# Altium PCB PCB1.pcbdoc
Units mil, origin at the board's own origin, x right, y up, seen from the top; angles counter-clockwise.
Board outline 1985.56 x 1960 mil, 2 copper layers (Top Layer, Bottom Layer); 23 components, 28 nets, 203 pads, 51 vias.
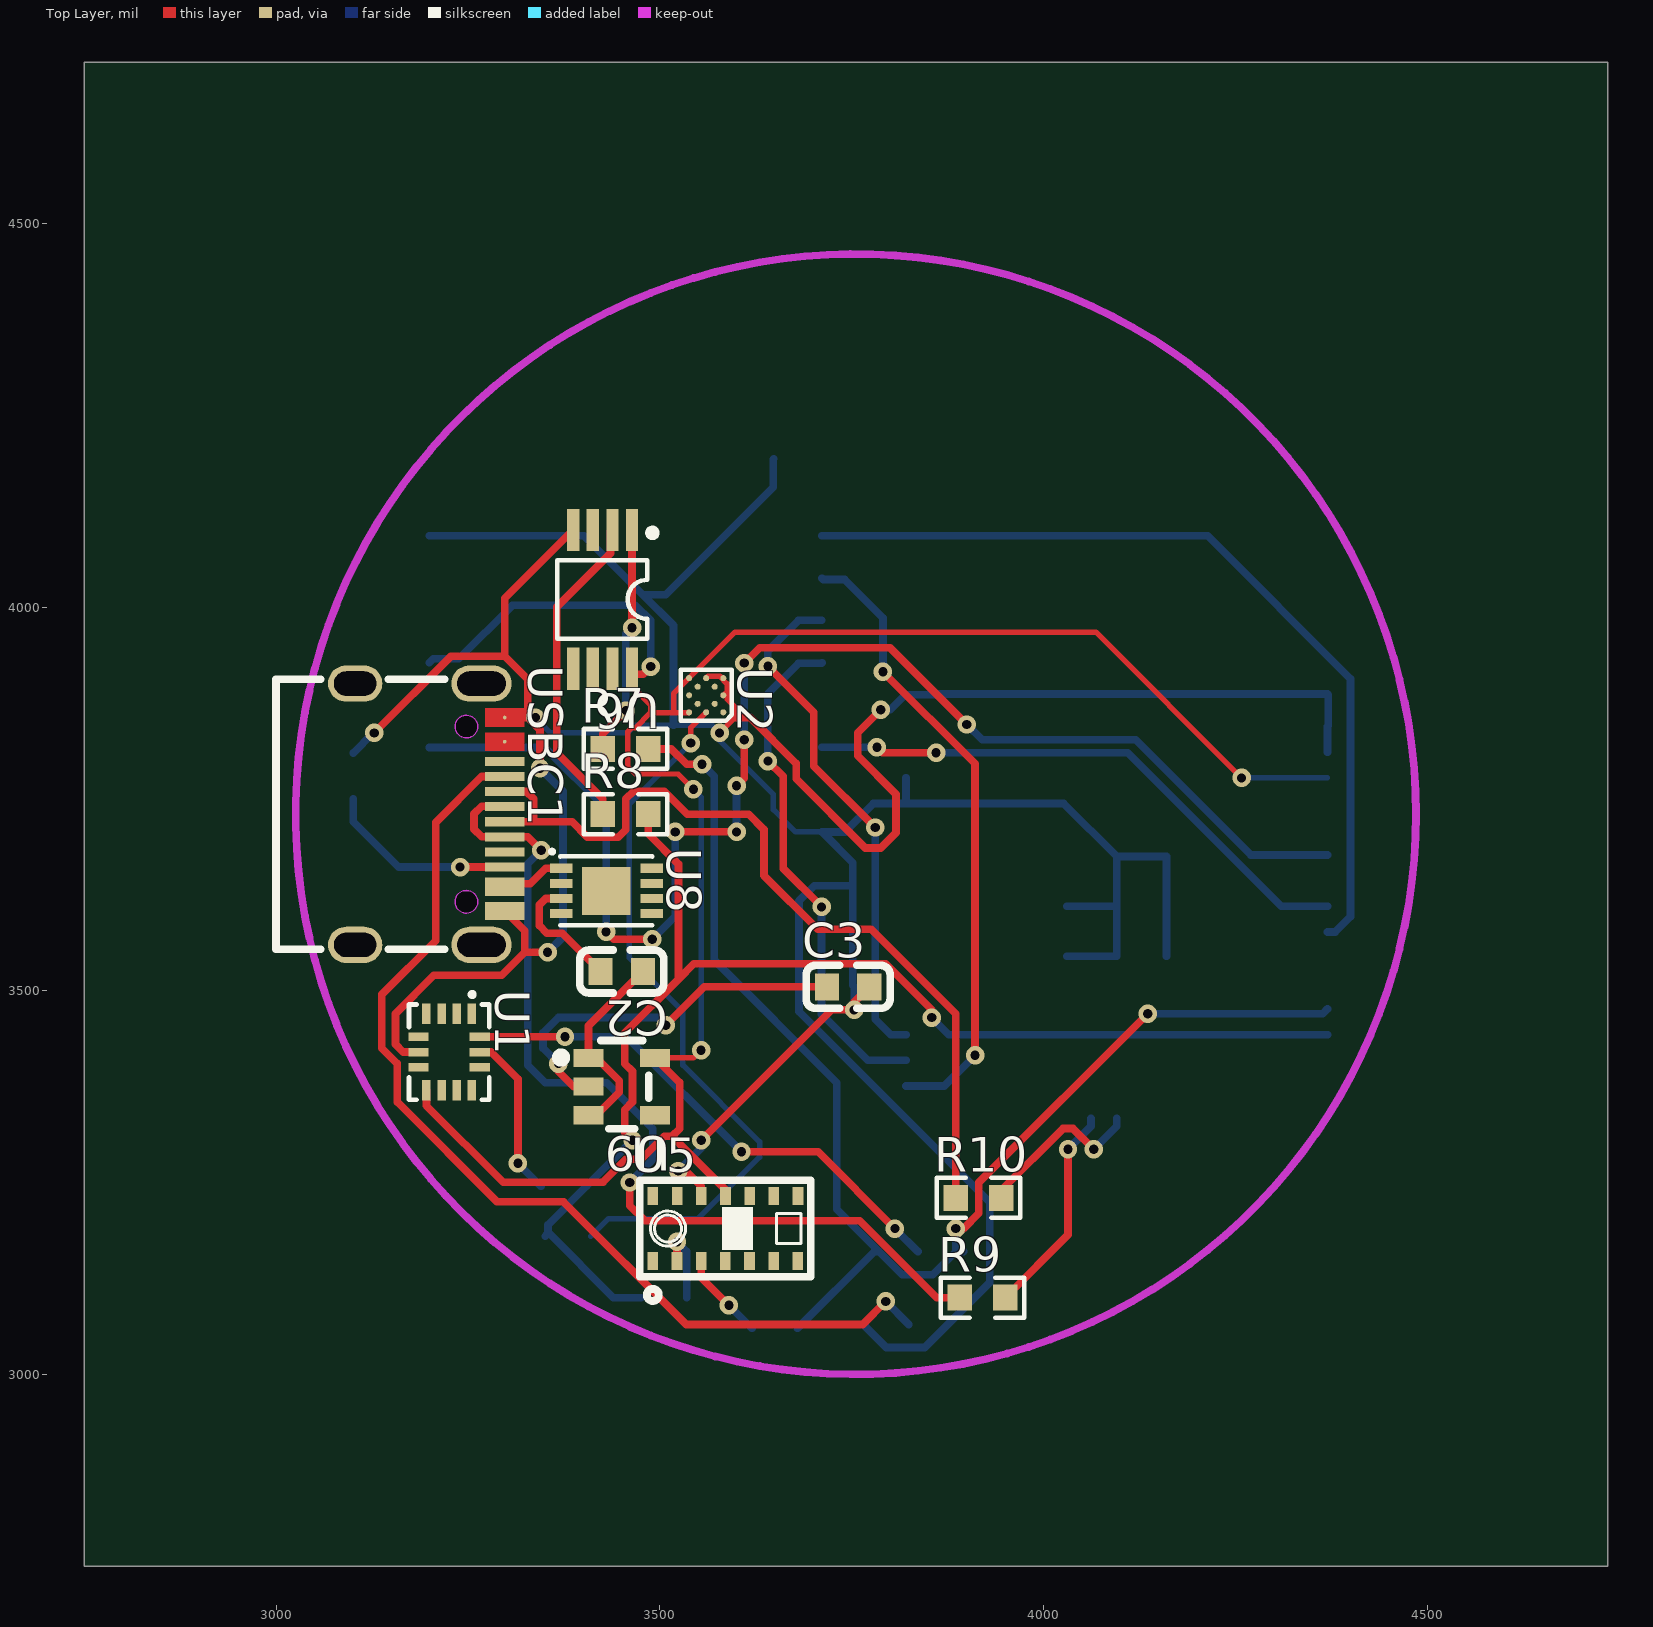
[diagram p0: Top Layer view]
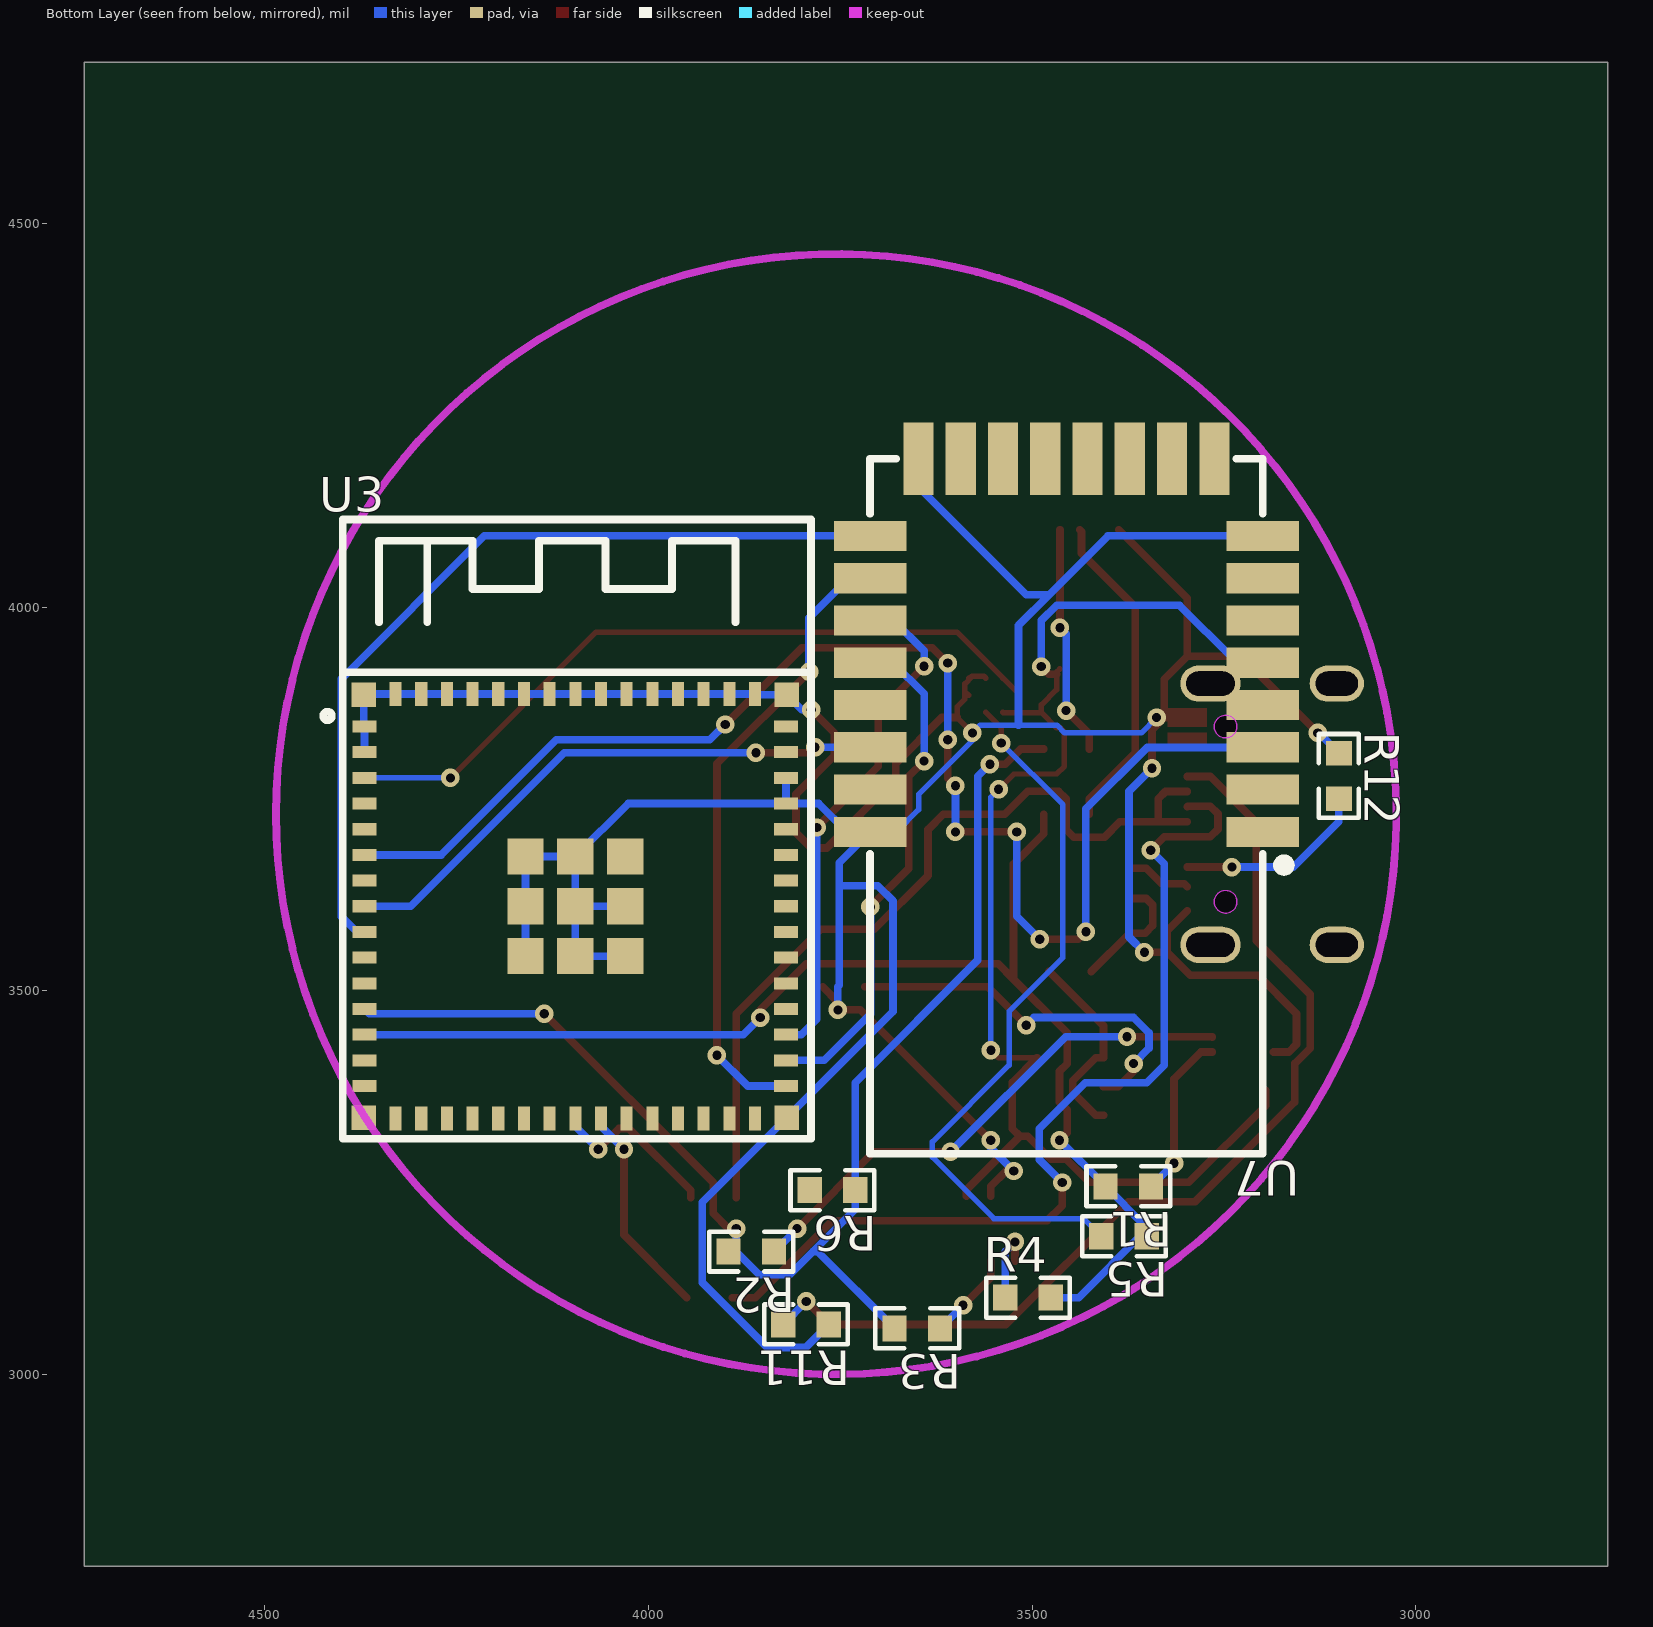
[diagram p1: Bottom Layer view, seen from below]

## Layer stack, top to bottom
Top Layer: signal copper (thickness not stored)
Dielectric: dielectric 12.6, FR-4, Dk 4.8
Bottom Layer: signal copper (thickness not stored)

## Board outline
4735.56,2750 2750,2750 2750,4710 4735.56,4710

## Design rules (kind name [scope] priority, off if disabled: settings)
BoardOutlineClearance copperThickness1oz [All] p0: genericclearance=10 ignorepadtopadclearanceinfootprint=FALSE except(0: Arc-SplitContinuation Track-SplitContinuation SMDPad-SplitContinuation THPad-SplitContinuation Via-SplitContinuation Fill-SplitContinuation Poly-SplitContinuation Region-SplitContinuation Text-SplitContinuation; 6: Track-CutoutEdge SMDPad-CutoutEdge THPad-CutoutEdge Via-CutoutEdge Region-CutoutEdge; 11.8: Track-OutlineEdge SMDPad-OutlineEdge THPad-OutlineEdge Via-OutlineEdge Fill-OutlineEdge Region-OutlineEdge Poly-OutlineEdge Text-OutlineEdge Fill-CutoutEdge)
BoardOutlineClearance copperThickness2oz [All] p0: genericclearance=10 ignorepadtopadclearanceinfootprint=FALSE except(0: Arc-SplitContinuation Track-SplitContinuation SMDPad-SplitContinuation THPad-SplitContinuation Via-SplitContinuation Fill-SplitContinuation Poly-SplitContinuation Region-SplitContinuation Text-SplitContinuation; 6: Track-CutoutEdge SMDPad-CutoutEdge THPad-CutoutEdge Via-CutoutEdge Region-CutoutEdge; 11.8: Track-OutlineEdge SMDPad-OutlineEdge THPad-OutlineEdge Via-OutlineEdge Fill-OutlineEdge Region-OutlineEdge Poly-OutlineEdge Text-OutlineEdge Fill-CutoutEdge)
Clearance copperThickness1oz [(InNet('$1N2853') OR InNet('$1N2944') OR InNet('GND') OR InNet('+3.3V') OR InNet('$1N3742') OR InNet('$1N3682') OR InNet('$1N3460') OR InNet('$1N3424') OR InNet('$1N4754') OR InNet('$1N4678') OR InNet('$1N4658') OR InNet('$1N5724') OR InNet('$1N5643') OR InNet('$1N4155') OR InNet('$1N4170') OR InNet('$1N4160') OR InNet('$1N5247') OR InNet('$1N5250') OR InNet('$1N5336') OR InNet('$1N3350') OR InNet('$1N3388') OR InNet('$1N3671') OR InNet('$1N3729') OR InNet('$1N5651') OR InNet('$1N5732') OR InNet('$1N5884') OR InNet('$1N5924') OR InNet('$1N5135'))] p1: gap=7 ignorepadtopadclearanceinfootprint=FALSE except(4: Track-Track; 6: Track-SMDPad SMDPad-SMDPad Track-THPad SMDPad-THPad THPad-THPad Track-Via SMDPad-Via THPad-Via Via-Via SMDPad-Fill THPad-Fill Via-Fill Fill-Fill Track-Region SMDPad-Region THPad-Region Via-Region Region-Region Track-Poly SMDPad-Poly THPad-Poly Via-Poly Fill-Poly Region-Poly Poly-Poly Track-Text SMDPad-Text THPad-Text Via-Text Fill-Text Region-Text Poly-Text Text-Text; 6.9: Track-Hole SMDPad-Hole THPad-Hole Via-Hole Fill-Hole Region-Hole Poly-Hole Text-Hole Sheet-Hole; 11.8: Track-Fill Fill-Region Track-Sheet SMDPad-Sheet THPad-Sheet Via-Sheet Fill-Sheet Region-Sheet Poly-Sheet Text-Sheet)
Clearance copperThickness2oz [All] p1: gap=7 ignorepadtopadclearanceinfootprint=FALSE except(6: Track-SMDPad SMDPad-SMDPad Track-THPad SMDPad-THPad THPad-THPad Track-Via SMDPad-Via THPad-Via Via-Via SMDPad-Fill THPad-Fill Via-Fill Fill-Fill Track-Region SMDPad-Region THPad-Region Via-Region Region-Region Track-Poly SMDPad-Poly THPad-Poly Via-Poly Fill-Poly Region-Poly Poly-Poly Track-Text SMDPad-Text THPad-Text Via-Text Fill-Text Region-Text Poly-Text Text-Text; 6.9: Track-Hole SMDPad-Hole THPad-Hole Via-Hole Fill-Hole Region-Hole Poly-Hole Text-Hole Sheet-Hole; 8: Track-Track; 11.8: Track-Fill Fill-Region Track-Sheet SMDPad-Sheet THPad-Sheet Via-Sheet Fill-Sheet Region-Sheet Poly-Sheet Text-Sheet)
DiffPairsRouting differentialPair [All] p1: maxuncoupledlength=10 minlimit=6 maxlimit=6 mostfreqgap=6 toplayer_minwidth=5 toplayer_prefwidth=10 toplayer_maxwidth=100 bottomlayer_minwidth=5 bottomlayer_prefwidth=10 bottomlayer_maxwidth=100
PasteMaskExpansion pasteMaskExpansion [All] p1: expansion=0
PlaneConnect innerPlane [All] p1: planeconnectstyle=Relief reliefexpansion=20 reliefentries=4 reliefconductorwidth=10 reliefairgap=10
PolygonConnect copperRegion [All] p1: connectstyle=Relief reliefentries=4 reliefconductorwidth=10 polygonreliefangle="90 Angle" airgapwidth=10
RoutingVias viaSize [All] p1: viastyle="Through Hole" holewidth=12.0078 minholewidth=11.811 maxholewidth=248.0314 width=24.0158 minwidth=19.685 maxwidth=393.7008
SolderMaskExpansion solderMaskExpansion [All] p1: useseparateexpansions=TRUE expansion=2 expansionbottom=2
Width copperThickness1oz [All] p1: maxlimit=100 minlimit=5 preferedwidth=10
Width copperThickness2oz [All] p1: maxlimit=100 minlimit=8 preferedwidth=10

## Components (designator, comment, footprint, x,y, rotation, side; value= is the part's Value field where it differs from the comment)
C2 "CAP_0603" C0603 3450.55,3525 r180 top
C3 "CAP_0603" C0603 3745.55,3505 r0 top
R1 "Res_0603" R0603 3374.88,3245 r0 bottom
R2 "Res_0603" R0603 3866.24,3160 r0 bottom
R3 "Res_0603" R0603 3649.88,3060 r0 bottom
R4 "Res_0603" R0603 3505.55,3100 r180 bottom
R5 "Res_0603" R0603 3380.55,3180 r0 bottom
R6 "Res_0603" R0603 3760.55,3240 r0 bottom
R7 "Res_0603" R0603 3455.55,3815 r0 top
R8 "Res_0603" R0603 3455.55,3730 r0 top
R9 "Res_0603" R0603 3920.55,3100 r0 top
R10 "Res_0603" R0603 3915.55,3230 r0 top
R11 "Res_0603" R0603 3794.88,3065 r0 bottom
R12 "Res_0603" R0603 3100.55,3780 r270 bottom
U1 "ICM-45686" LGA-14_L3.0-W2.5-P0.50-TL 3225.55,3420 r270 top
U2 "BMM150" WLCSP-12_L1.6-W1.6_BMM150 3560.55,3885 r270 top
U3 "ESP32-S3-MINI-1-N8" BULETM-SMD_ESP32-S3-MINI-1-N8 4095.55,3610 r180 bottom
U5 "MAX30100EFD+" SENSOR-SMD_MAX30100EFD 3585.55,3190 r0 top
U6 "MCP9808-E/MS" MSOP-8_L3.0-W3.0-P0.65-LS4.9-BL 3425.55,4010 r180 top
U7 "BU03" WIRELM-SMD_BU03 3455.55,3950 r0 bottom
U8 "MCP73831-2ACI/MC" TDFN-8_L3.0-W2.0-P0.50-BL-EP1.6 3430.55,3630 r270 top
U9 "AP2112K-3.3TRG1_C23380830" SOT-23-5_L2.9-W1.6-P0.95-LS2.8-BR 3450.55,3375 r180 top
USBC1 "TYPE-C-31-M-12" USB-C_SMD-TYPE-C-31-M-12_1 3200.55,3730 r270 top

## Footprints (in the part's own frame and the unit in brackets; to place one, negate y for a bottom-side part, rotate by r counter-clockwise, add the part's x,y. Pads: shape width x height; smd on the part's side, far side on the other; paste and mask are expansions set on the pad)
BULETM-SMD_ESP32-S3-MINI-1-N8 [mm]
  rect 0.8x0.4 smd: 1(-6.975,5.95) 2(-6.975,5.1) 3(-6.975,4.25) 4(-6.975,3.4) 5(-6.975,2.55) 6(-6.975,1.7) 7(-6.975,0.85) 8(-6.975,0) 9(-6.975,-0.85) 10(-6.975,-1.7) 11(-6.975,-2.55) 12(-6.975,-3.4) 13(-6.975,-4.25) 14(-6.975,-5.1) 15(-6.975,-5.95) 31(6.975,-5.95) 32(6.975,-5.1) 33(6.975,-4.25) 34(6.975,-3.4) 35(6.975,-2.55) 36(6.975,-1.7) 37(6.975,-0.85) 38(6.975,0) 39(6.975,0.85) 40(6.975,1.7) 41(6.975,2.55) 42(6.975,3.4) 43(6.975,4.25) 44(6.975,5.1) 45(6.975,5.95)
  rect 0.4x0.8 smd: 16(-5.95,-7.025) 17(-5.1,-7.025) 18(-4.25,-7.025) 19(-3.4,-7.025) 20(-2.55,-7.025) 21(-1.7,-7.025) 22(-0.85,-7.025) 23(0,-7.025) 24(0.85,-7.025) 25(1.7,-7.025) 26(2.55,-7.025) 27(3.4,-7.025) 28(4.25,-7.025) 29(5.1,-7.025) 30(5.95,-7.025) 46(5.95,7.025) 47(5.1,7.025) 48(4.25,7.025) 49(3.4,7.025) 50(2.55,7.025) 51(1.7,7.025) 52(0.85,7.025) 53(0,7.025) 54(-0.85,7.025) 55(-1.7,7.025) 56(-2.55,7.025) 57(-3.4,7.025) 58(-4.25,7.025) 59(-5.1,7.025) 60(-5.95,7.025)
  rect 0.8x0.8 smd: GND(-7,-7) GND(-7,7) GND(7,-7) GND(7,7)
  rect 1.2x1.2 smd: GND(-1.65,-1.65) GND(-1.65,0) GND(-1.65,1.65) GND(0,-1.65) GND(0,0) GND(0,1.65) GND(1.65,-1.65) GND(1.65,0) GND(1.65,1.65)
  silkscreen extent -8.34,-7.7 7.8,12.8
C0603 [mm]
  rect 0.8x0.9 smd: 1(-0.7,0) 2(0.7,0)
  silkscreen extent -1.39,-0.71 1.39,0.71
LGA-14_L3.0-W2.5-P0.50-TL [mm]
  rect 0.675x0.28 smd: 1(-1.262,0.75) 2(-1.262,0.25) 3(-1.262,-0.25) 4(-1.262,-0.75) 8(1.262,-0.75) 9(1.262,-0.25) 10(1.262,0.25) 11(1.262,0.75)
  rect 0.28x0.675 smd: 5(-0.5,-1.012) 6(0,-1.012) 7(0.5,-1.012) 12(0.5,1.012) 13(0,1.012) 14(-0.5,1.012)
  silkscreen extent -1.98,-1.33 1.58,1.33
MSOP-8_L3.0-W3.0-P0.65-LS4.9-BL [mil]
  rect 15.98x55 smd: 1(-38.39,-90.55) 2(-12.8,-90.55) 3(12.8,-90.55) 4(38.39,-90.55) 5(38.39,90.55) 6(12.8,90.55) 7(-12.8,90.55) 8(-38.39,90.55)
  silkscreen extent -70,-91 59,51
R0603 [mil]
  rect 31.75x34.02 smd: 1(-29.66,0) 2(29.66,0)
  silkscreen extent -55,-26 55,26
SENSOR-SMD_MAX30100EFD [mm]
  rect 0.35x0.6 smd: 1(-2.404,-1.075) 2(-1.6,-1.075) 3(-0.8,-1.075) 4(0,-1.075) 5(0.8,-1.075) 6(1.602,-1.075) 7(2.4,-1.075) 8(2.404,1.075) 9(1.604,1.075) 10(0.804,1.075) 11(0.004,1.075) 12(-0.797,1.075) 13(-1.597,1.075) 14(-2.397,1.075)
  silkscreen extent -2.83,-2.4 2.83,1.6
SOT-23-5_L2.9-W1.6-P0.95-LS2.8-BR [mm]
  rect 1x0.6 smd: 1(1.1,-0.95) 2(1.1,0) 3(1.1,0.95) 4(-1.1,0.95) 5(-1.1,-0.95)
  silkscreen extent -0.89,-1.52 2.16,1.4
TDFN-8_L3.0-W2.0-P0.50-BL-EP1.6 [mm]
  rect 0.3x0.75 smd: 1(-0.75,-1.5) 2(-0.25,-1.5) 3(0.25,-1.5) 4(0.75,-1.5) 5(0.75,1.5) 6(0.25,1.5) 7(-0.25,1.5) 8(-0.75,1.5)
  rect 1.6x1.6 smd: 9(0,0)
  silkscreen extent -1.36,-1.86 1.14,1.52
USB-C_SMD-TYPE-C-31-M-12_1 [mm]
  oval 1.2x2 hole 0.8 slot 1.6 at 90 deg: 1(4.325,1.706) 4(-4.325,1.706)
  oval 1.2x1.8 hole 0.8 slot 1.4 at 90 deg copper offset 0,0: 2(4.325,-2.474) 3(-4.325,-2.474)
  round 0.12 smd: A1B12(-3.2,2.474) A4B9(-2.4,2.474)
  rect 0.3x1.3 smd: A5(-1.25,2.474) A6(-0.25,2.474) A7(0.25,2.474) A8(1.25,2.474) B5(1.75,2.474) B6(0.75,2.474) B7(-0.75,2.474) B8(-1.75,2.474)
  rect 0.6x1.3 smd: B1A12(3.2,2.474) B4A9(2.4,2.474)
  Top Layer region: -2.9,1.824 -2.9,3.124 -3.2,3.124 -3.2,3.124 -3.5,3.124 -3.5,1.824 -3.2,1.824 -3.2,1.824
  Top Layer region: -2.1,1.824 -2.1,3.124 -2.4,3.124 -2.4,3.124 -2.7,3.124 -2.7,1.824 -2.4,1.824 -2.4,1.824
  Board Outline Layer circle w0.005: c-2.9,1.206 r0.375
  Board Outline Layer circle w0.005: c2.9,1.206 r0.375
  Board Outline Layer region: -2.9,1.581 -2.737,1.543 -2.607,1.439 -2.534,1.289 -2.534,1.122 -2.607,0.972 -2.737,0.868 -2.9,0.831 -2.9,0.831 -3.063,0.868 -3.193,0.972 -3.266,1.122 -3.266,1.289 -3.193,1.439 -3.063,1.543 -2.9,1.581
  Board Outline Layer region: 2.9,1.581 3.063,1.543 3.193,1.439 3.266,1.289 3.266,1.122 3.193,0.972 3.063,0.868 2.9,0.831 2.9,0.831 2.737,0.868 2.607,0.972 2.534,1.122 2.534,1.289 2.607,1.439 2.737,1.543 2.9,1.581
  Multi-Layer board cut-out: -2.9,1.581 -2.737,1.543 -2.607,1.439 -2.534,1.289 -2.534,1.122 -2.607,0.972 -2.737,0.868 -2.9,0.831 -2.9,0.831 -3.063,0.868 -3.193,0.972 -3.266,1.122 -3.266,1.289 -3.193,1.439 -3.063,1.543 -2.9,1.581
  Multi-Layer board cut-out: 2.9,1.581 3.063,1.543 3.193,1.439 3.266,1.289 3.266,1.122 3.193,0.972 3.063,0.868 2.9,0.831 2.9,0.831 2.737,0.868 2.607,0.972 2.534,1.122 2.534,1.289 2.607,1.439 2.737,1.543 2.9,1.581
  silkscreen extent -4.47,-5.09 4.47,0.49
WIRELM-SMD_BU03 [mm]
  rect 2.4x1 smd: 1(-6.5,6.175) 2(-6.5,4.775) 3(-6.5,3.375) 4(-6.5,1.975) 5(-6.5,0.575) 6(-6.5,-0.825) 7(-6.5,-2.225) 8(-6.5,-3.625) 17(6.5,-3.625) 18(6.5,-2.225) 19(6.5,-0.825) 20(6.5,0.575) 21(6.5,1.975) 22(6.5,3.375) 23(6.5,4.775) 24(6.5,6.175)
  rect 1x2.4 smd: 9(-4.9,-6.175) 10(-3.5,-6.175) 11(-2.1,-6.175) 12(-0.7,-6.175) 13(0.7,-6.175) 14(2.1,-6.175) 15(3.5,-6.175) 16(4.9,-6.175)
  silkscreen extent -7.55,-6.17 6.5,16.82
WLCSP-12_L1.6-W1.6_BMM150 [mm]
  round 0.2 smd: A1(0.566,0.566) A3(0.566,0) A5(0.566,-0.566) B2(0.283,0.283) B4(0.283,-0.283) C1(0,0.566) C5(0,-0.566) D2(-0.283,0.283) D4(-0.283,-0.283) E1(-0.566,0.566) E3(-0.566,0) E5(-0.566,-0.566)
  silkscreen extent -0.85,-0.85 0.85,0.85

## Via types
v1: diameter 24.02, hole 12.01, Top Layer to Bottom Layer, 51 vias

## Nets (pads, with @x,y where several pads share a name; then routed paths per layer and width w, separated by ;. In a path a pad name is that pad's centre, name@x,y a point inside that pad or via, vN(x,y) a via of type N, cw(c..) or ccw(c..) an arc to the next point about the centre after c; other vN are vias at no path point)
$1N2853: R1.1 U1.13 | length 216.7
  Top Layer w10: U1.13 3280.21,3420.01 3315.22,3385 v1(3315.22,3275)
  Bottom Layer w10: v1(3315.22,3275) R1.1
$1N2944: R2.1 U1.14 | length 687.3
  Top Layer w10: U1.14 3265.73,3440 v1(3376.57,3440) ; v1(3606.57,3290) 3706.57,3290 v1(3806.57,3190)
  Bottom Layer w10: v1(3376.57,3440) 3456.57,3440 v1(3606.57,3290) ; v1(3806.57,3190) R2.1
$1N3350: R3.1 U5.3 | length 115.1
  Top Layer w10: U5.3 3554.05,3126.16 v1(3590.22,3090)
  Bottom Layer w10: v1(3590.22,3090) R3.1
$1N3388: R4.1 U5.2 | length 102.9
  Top Layer w10: U5.2 v1(3522.55,3172.66)
  Bottom Layer w10: v1(3522.55,3172.66) 3535.22,3160 R4.1
$1N3424: R5.2 U2.A3 | length 954.3
  Top Layer w7.12: v1(3540.56,3822.72) 3540.56,3842.72 U2.A3
  Bottom Layer w7.12: R5.2 3433.28,3203.06 3550.22,3203.06 3630.22,3283.06 3630.22,3303.06 3530.22,3403.06 3530.22,3473.06 3460.22,3543.06 3460.22,3742.37 v1(3540.56,3822.72)
$1N3460: R6.2 U2.B4
$1N3671: R7.1 U6.1 | length 301.3
  Top Layer w10: R7.1 3425.89,3835 v1(3455.89,3865) ; v1(3463.95,3973.05) U6.1
  Bottom Layer w10: v1(3455.89,3865) 3455.89,3965 v1(3463.95,3973.05)
$1N3682: R2.2 R3.2 R6.1 R7.2 U3.12 | length 1747.7
  Top Layer w10: R7.2 3515.22,3815 3535.22,3795 v1(3555.22,3795) ; v1(3885.89,3190) 3895.89,3190 3915.89,3210 3915.89,3250 v1(4135.9,3470)
  Bottom Layer w10: v1(3555.22,3795) 3570.89,3779.32 3570.89,3540 3730.89,3380 R6.1 3730.89,3215 3785.89,3160 ; R3.2 3779.53,3160 3785.89,3160 ; v1(3885.89,3190) R2.2@3885.89,3160 ; R2.2 R2.2@3885.89,3160 ; v1(4135.9,3470) 4364.02,3470 U3.12 ; 3785.89,3160 3815.89,3130 3855.89,3130 R2.2@3885.89,3160
$1N3729: R8.1 U6.2 | length 425.4
  Top Layer w10: R8.1 3425.89,3750 3365.89,3810 3365.89,4000 3435.89,4070 3435.89,4098.09 U6.2
$1N3742: R1.2 R4.2 R5.1 R8.2 U3.13 | length 1709
  Top Layer w10: v1(3464.53,3305) 3454.53,3315 3454.53,3345 3464.53,3355 3464.53,3395 3454.53,3405 3454.53,3445 3524.53,3515 ; R8.2 3485.22,3704.32 3524.53,3665 3524.53,3515 ; v1(3854.53,3465) 3854.53,3475 3794.53,3535 3544.53,3535 3524.53,3515
  Bottom Layer w10: R5.1 R5.1@3354.53,3185 ; v1(3464.53,3305) R1.2 3354.53,3195 R5.1@3354.53,3185 ; R4.2 3439.53,3100 R5.1@3354.53,3185 ; v1(3854.53,3465) 3876.85,3442.68 U3.13
$1N4155: U3.31 U7.18 | length 827.2
  Top Layer w10: v1(3790.95,3915.76) 3910.95,3795.76 v1(3910.95,3415.76)
  Bottom Layer w10: U7.18 3713.3,4035.76 3740.95,4035.76 3790.95,3985.76 v1(3790.95,3915.76) ; U3.31 3870.95,3375.76 v1(3910.95,3415.76)
$1N4160: U3.33 U7.19 | length 673.2
  Top Layer w10: v1(3640.95,3922.68) 3700.95,3862.68 3700.95,3792.68 v1(3780.95,3712.68)
  Bottom Layer w10: v1(3640.95,3922.68) 3640.95,3942.68 3680.95,3982.68 U7.19@3711.26,3982.68 ; v1(3780.95,3712.68) 3780.95,3462.68 3800.95,3442.68 U3.33
$1N4170: U3.32 U7.20 | length 668.8
  Top Layer w10: v1(3640.95,3799.22) 3660.95,3779.22 3660.95,3659.22 v1(3710.95,3609.22)
  Bottom Layer w10: v1(3640.95,3799.22) 3640.95,3886.85 3680.95,3926.85 3710.95,3926.85 U7.20 ; v1(3710.95,3609.22) 3710.95,3469.22 3770.95,3409.22 U3.32
$1N4658: U3.9 U7.17 | length 1114.1
  Bottom Layer w10: U7.17 4213.99,4092.72 4400.16,3906.55 4400.16,3596.55 4380.16,3576.55 U3.9
$1N4678: U3.8 U7.22 | length 744.5
  Top Layer w10: v1(3783.04,3817.13) 3790.16,3810.01 v1(3860.16,3810.01)
  Bottom Layer w10: U7.22 v1(3783.04,3817.13) ; v1(3860.16,3810.01) 4110.16,3810.01 4310.16,3610.01 U3.8
$1N4754: U3.6 U7.3 | length 1824.3
  Top Layer w10: v1(3430.16,3576.93) 3440.16,3566.93 v1(3490.16,3566.93) ; v1(3520.16,3706.93) v1(3600.16,3706.93) ; v1(3600.16,3766.93) 3610.16,3776.93 v1(3610.16,3826.93) ; v1(3610.16,3926.93) 3630.16,3946.93 3800.16,3946.93 v1(3900.16,3846.93)
  Bottom Layer w10: U7.3@3199.84,3816.93 3350.16,3816.93 3430.16,3736.93 v1(3430.16,3576.93) ; v1(3490.16,3566.93) 3520.16,3596.93 v1(3520.16,3706.93) ; v1(3600.16,3706.93) v1(3600.16,3766.93) ; v1(3610.16,3826.93) v1(3610.16,3926.93) ; v1(3900.16,3846.93) 3920.16,3826.93 4120.16,3826.93 4270.16,3676.93 U3.6
$1N5135: U8.1 USBC1.B4A9 | length 83.5
  Top Layer w10: USBC1.B4A9 3301.99,3639.53 3331.5,3639.53 3351.5,3659.53 U8.1
$1N5247: C2.2 U8.3 | length 163.5
  Top Layer w10: U8.3 3351.5,3620.15 3342.99,3611.64 3342.99,3585 3352.99,3575 3372.99,3575 C2.2
$1N5250: C2.1 U9.1 U9.3 | length 261.6
  Top Layer w10: U9.3 3417.25,3337.61 3447.25,3367.61 3447.25,3382.39 3417.25,3412.39 U9.1 3407.25,3454.13 C2.1
$1N5336: C3.1 U9.2 | length 509
  Top Layer w10: v1(3367.99,3405) 3367.99,3395 3387.99,3375 U9.2 ; v1(3507.99,3455) 3557.99,3505 C3.1
  Bottom Layer w10: v1(3367.99,3405) 3347.99,3425 3347.99,3445 3367.99,3465 3497.99,3465 v1(3507.99,3455)
$1N5643: R9.2 U3.24 | length 279.8
  Top Layer w10: R9.2 4032.09,3181.88 v1(4032.09,3293.43)
  Bottom Layer w10: v1(4032.09,3293.43) 4062.09,3323.43 U3.24
$1N5651: R9.1 USBC1.A6 USBC1.B6 | length 1240
  Top Layer w10: USBC1.A6 3297.33,3740.47 3267.96,3740.47 3257.96,3730.47 3257.96,3710.47 3267.96,3700.47 USBC1.B6 3327.96,3700.47 v1(3345.49,3682.93) ; v1(3460.89,3250) 3460.89,3220 3480.89,3200 3760.89,3200 3860.89,3100 R9.1
  Bottom Layer w10: v1(3345.49,3682.93) 3327.96,3665.4 3327.96,3402.93 3350.89,3380 3430.89,3380 3490.89,3320 3490.89,3280 v1(3460.89,3250)
$1N5724: R10.2 U3.23 | length 227.2
  Top Layer w10: R10.2 3945.22,3240 4025.55,3320.34 4038.64,3320.34 v1(4065.55,3293.43)
  Bottom Layer w10: v1(4065.55,3293.43) 4095.55,3323.43 U3.23
$1N5732: R10.1 USBC1.A7 USBC1.B7 | length 1111.5
  Top Layer w10: USBC1.B7 3326.36,3759.53 3335.89,3750 3335.89,3720 ; USBC1.A7@3298.12,3720 3335.89,3720 ; R10.1 3885.89,3470 3775.89,3580 3705.89,3580 3635.89,3650 3635.89,3710 3615.89,3730 3535.89,3730 3505.89,3760 3465.89,3760 3455.89,3750 3455.89,3710 3445.89,3700 3405.89,3700 3385.89,3720 3335.89,3720
$1N5884: R11.2 USBC1.A5 | length 1327.9
  Top Layer w10: USBC1.A5 3267.96,3779.21 3207.96,3719.21 3207.96,3565 3137.96,3495 3137.96,3425 3157.96,3405 3157.96,3355 3287.96,3225 3374.53,3225 3534.53,3065 3764.53,3065 v1(3794.53,3095)
  Bottom Layer w10: v1(3794.53,3095) R11.2
$1N5924: R12.2 USBC1.B5 | length 251.9
  Top Layer w10: v1(3239.8,3661.1) USBC1.B5
  Bottom Layer w10: R12.2 3100.55,3720.34 3159.8,3661.1 v1(3239.8,3661.1)
+3.3V: U1.8 U2.A5 U2.B2 U2.E5 U3.3 U5.11 U6.8 U7.5 U9.5 | length 2742.3
  Top Layer w7.12: U6.8 3468.27,3915.12 3468.27,3912.41 3468.27,3892.41 3488.27,3872.41 3488.27,3862.41 ; U9.5 3543.87,3412.41 v1(3553.87,3422.41) ; U2.A5 3537.96,3862.41 3518.27,3862.41 ; v1(3543.87,3762.41) 3523.87,3782.41 3468.27,3782.41 3458.27,3792.41 3458.27,3837.41 3463.27,3842.41 3468.27,3842.41 3488.27,3862.41 ; v1(4258.27,3777.28) 4068.27,3967.28 3598.27,3967.28 U2.E5 3518.27,3887.28 3518.27,3862.41 ; 3488.27,3862.41 3518.27,3862.41
  Top Layer w10: U1.8 3196.03,3350.32 3296.03,3250.32 3426.03,3250.32 3456.03,3280.32 3476.03,3280.32 3506.03,3310.32 3516.03,3310.32 ; U6.8@3468.27,3912.41 3478.27,3912.41 v1(3488.27,3922.41) ; U9.5 3526.03,3380.25 3526.03,3320.32 3516.03,3310.32 ; U5.11 3585.72,3240.62 3516.03,3310.32
  Bottom Layer w7.12: v1(3543.87,3762.41) 3553.87,3752.41 v1(3553.87,3422.41) ; v1(4258.27,3777.28) U3.3@4370.12,3777.28
  Bottom Layer w10: U7.5 3204.69,3932.41 3238.27,3932.41 3308.27,4002.41 3468.27,4002.41 3488.27,3982.41 v1(3488.27,3922.41)
GND: C3.2 R11.1 R12.1 U1.6 U2.C1 U2.C5 U2.E1 U2.E3 U3.1 U3.2 U3.42 U3.43 U3.46 U3.47 U3.48 U3.49 U3.50 U3.51 U3.52 U3.53 U3.54 U3.55 U3.56 U3.57 U3.58 U3.59 U3.60 U3.GND U5.12 U6.4 U7.8 U7.16 U7.24 USBC1.A1B12 USBC1.B1A12 | length 6260
  Top Layer w7.12: v1@3327.98,3855.98 v1(3337.98,3855.98) ; U2.E3 3563.14,3909.86 3577.98,3909.86 ; v1(3577.98,3835.98) 3597.98,3855.98 3597.98,3869.86 3587.98,3879.86 3587.98,3889.86 ; U2.C1 3587.98,3889.86 ; U2.E1 3577.98,3909.86 ; 3577.98,3909.86 3587.98,3899.86 3587.98,3889.86
  Top Layer w10: v1(3127.98,3835.98) 3227.98,3935.98 3297.98,3935.98 ; U1.6 3165.7,3420.01 3155.7,3430.01 3155.7,3470.01 3205.7,3520.01 3293.95,3520.01 3323.95,3550.01 ; USBC1.B1A12 3323.95,3578.01 3323.95,3550.01 ; USBC1.A1B12 v1@3327.98,3855.98 ; v1(3343.95,3790.01) 3343.95,3840.01 v1@3327.98,3855.98 ; v1(3353.95,3550.01) 3323.95,3550.01 ; U6.4 3297.98,4011.36 3297.98,3935.98 ; v1(3524.2,3265) 3534.2,3265 3554.2,3245 U5.12 ; v1(3554.2,3305) 3724.2,3475 v1(3753.35,3475) 3753.35,3485.24 C3.2 ; 3597.98,3855.98 3617.98,3855.98 3677.98,3795.98 3677.98,3775.98 3767.98,3685.98 3787.98,3685.98 3807.98,3705.98 3807.98,3755.98 3757.98,3805.98 3757.98,3835.98 v1(3787.98,3865.98) ; 3297.98,3935.98 3327.98,3905.98 v1@3327.98,3855.98
  Bottom Layer w7.12: v1(3337.98,3855.98) 3357.98,3835.98 3457.98,3835.98 3467.98,3845.98 3517.98,3845.98 3567.98,3845.98 v1(3577.98,3835.98) 3577.98,3825.98 3647.98,3755.98 3647.98,3735.98 3677.07,3706.89 U7.24
  Bottom Layer w10: R12.1 3126.88,3835.98 v1(3127.98,3835.98) ; U7.8 3401.24,4092.72 3477.98,4015.98 ; v1(3343.95,3790.01) 3373.95,3760.01 3373.95,3570.01 v1(3353.95,3550.01) ; 3517.98,3845.98 3517.98,3975.98 3477.98,4015.98 ; v1(3524.2,3265) 3554.2,3295 v1(3554.2,3305) ; U7.16 3647.98,4192.62 3647.98,4155.98 3507.98,4015.98 3477.98,4015.98 ; v1(3753.35,3475) 3753.35,3505 3751.46,3506.89 3751.46,3636.89 ; R11.1 3795.22,3035 3845.22,3035 3929.97,3119.75 3929.97,3224.41 3819.97,3334.41 3681.46,3472.92 3681.46,3616.89 3701.46,3636.89 3751.46,3636.89 ; v1(3787.98,3865.98) 3800.35,3865.98 3819.97,3885.59 3860.32,3885.59 U3.46 U3.47 U3.48 U3.49 U3.50 U3.51 U3.52 U3.53 U3.54 U3.55 U3.56 U3.57 U3.58 U3.59 U3.60 4370.16,3886.57 4371.15,3885.59 4371.15,3845.24 U3.1 U3.2 ; U3.43 U3.42 ; U3.GND@4030.59,3545.05 4095.55,3545.05 U3.GND@4095.55,3610.01 ; U3.GND@4030.59,3610.01 U3.GND@4095.55,3610.01 ; U3.GND@4160.52,3545.05 4160.52,3610.01 4160.52,3674.97 U3.GND@4095.55,3674.97 ; 3751.46,3636.89 3751.46,3666.89 U7.24 3741.46,3706.89 3778.43,3743.86 U3.42 ; U3.42 4026.66,3743.86 U3.GND@4095.55,3674.97 ; U3.GND@4095.55,3610.01 U3.GND@4095.55,3674.97
pads on no net: U1.1 U1.2 U1.3 U1.4 U1.5 U1.7 U1.9 U1.10 U1.11 U1.12 U2.A1 U2.D2 U2.D4 U3.4 U3.5 U3.7 U3.10 U3.11 U3.14 U3.15 U3.16 U3.17 U3.18 U3.19 U3.20 U3.21 U3.22 U3.25 U3.26 U3.27 U3.28 U3.29 U3.30 U3.34 U3.35 U3.36 U3.37 U3.38 U3.39 U3.40 U3.41 U3.44 U3.45 U5.1 U5.4 U5.5 U5.6 U5.7 U5.8 U5.9 U5.10 U5.13 U5.14 U6.3 U6.5 U6.6 U6.7 U7.1 U7.2 U7.4 U7.6 U7.7 U7.9 U7.10 U7.11 U7.12 U7.13 U7.14 U7.15 U7.21 U7.23 U8.2 U8.4 U8.5 U8.6 U8.7 U8.8 U8.9 U9.4 USBC1.1 USBC1.2 USBC1.3 USBC1.4 USBC1.A4B9 USBC1.A8 USBC1.B8

## Keep-outs
Board Outline Layer:
  circle w10: c3755.55,3730 r730